# Altium PCB PCB1.PcbDoc
Units mil, origin at the board's own origin, x right, y up, seen from the top; angles counter-clockwise.
Board outline 6000 x 4000 mil, 2 copper layers (Top Layer, Bottom Layer); 50 components, 34 nets, 157 pads, 16 vias.
Unrouted connection lines stored in the file: 5.
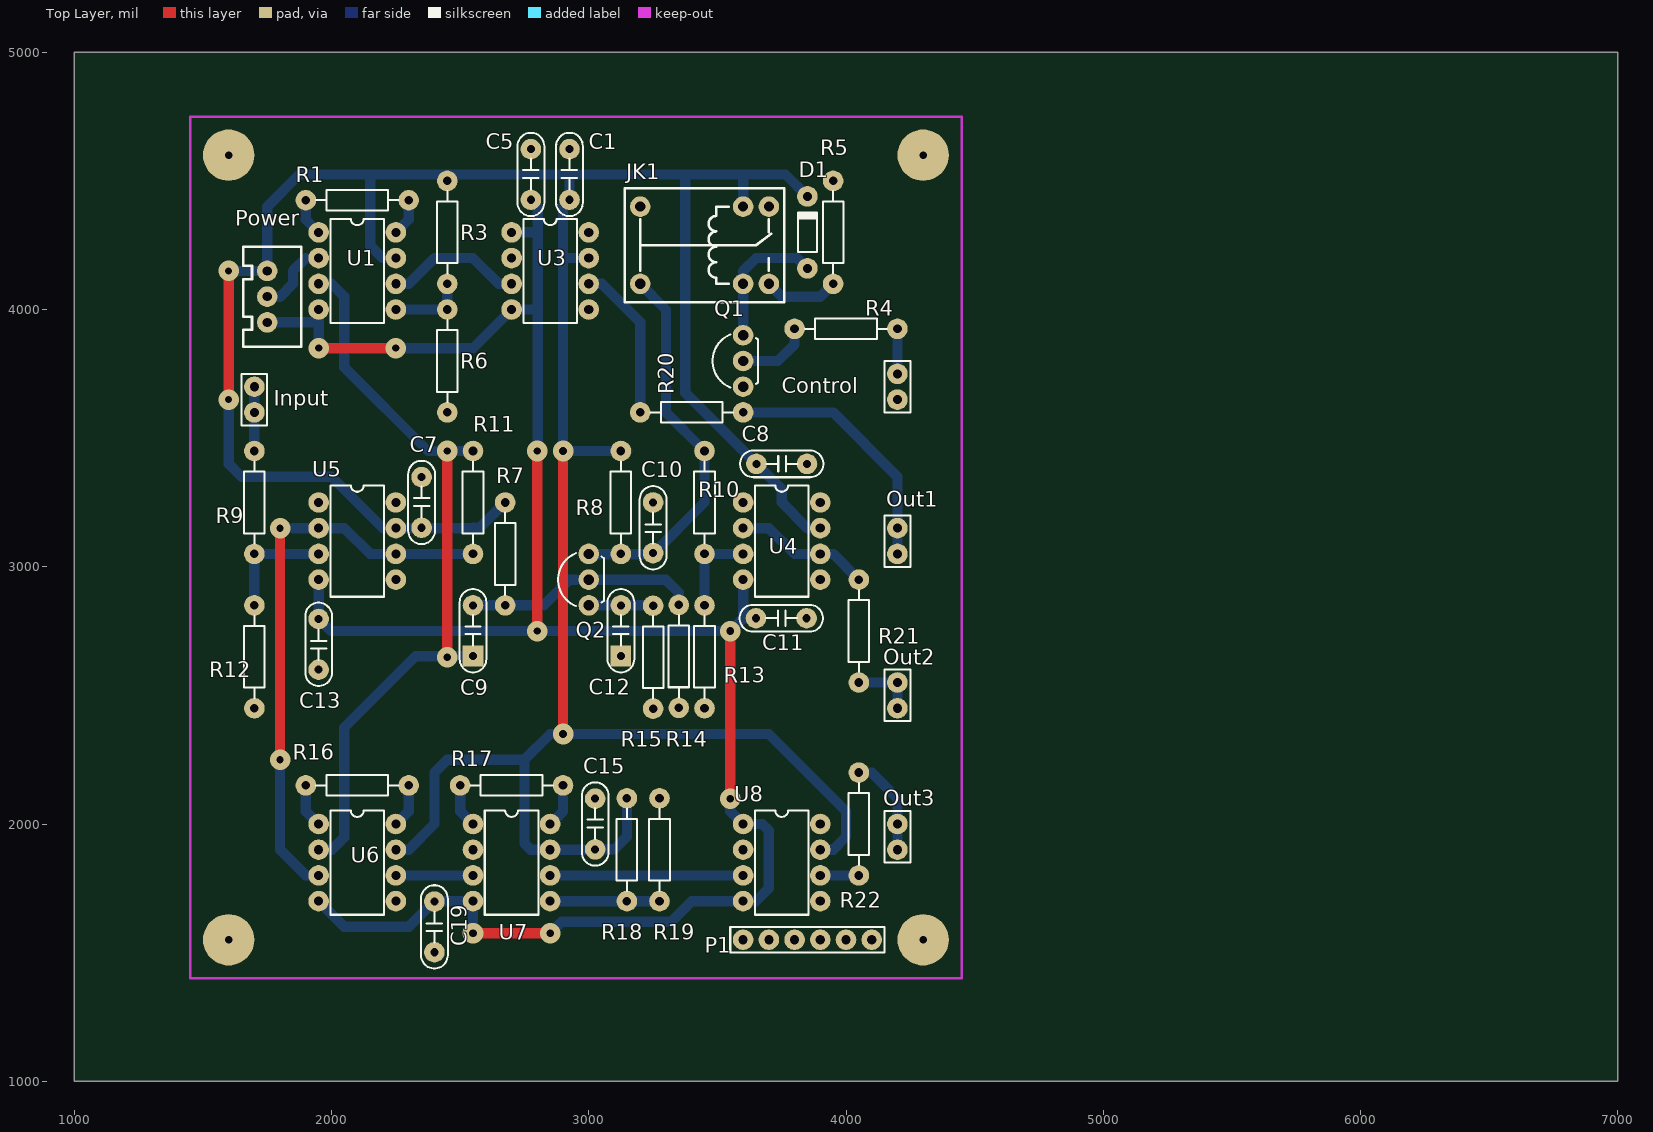
[diagram p0: Top Layer view]
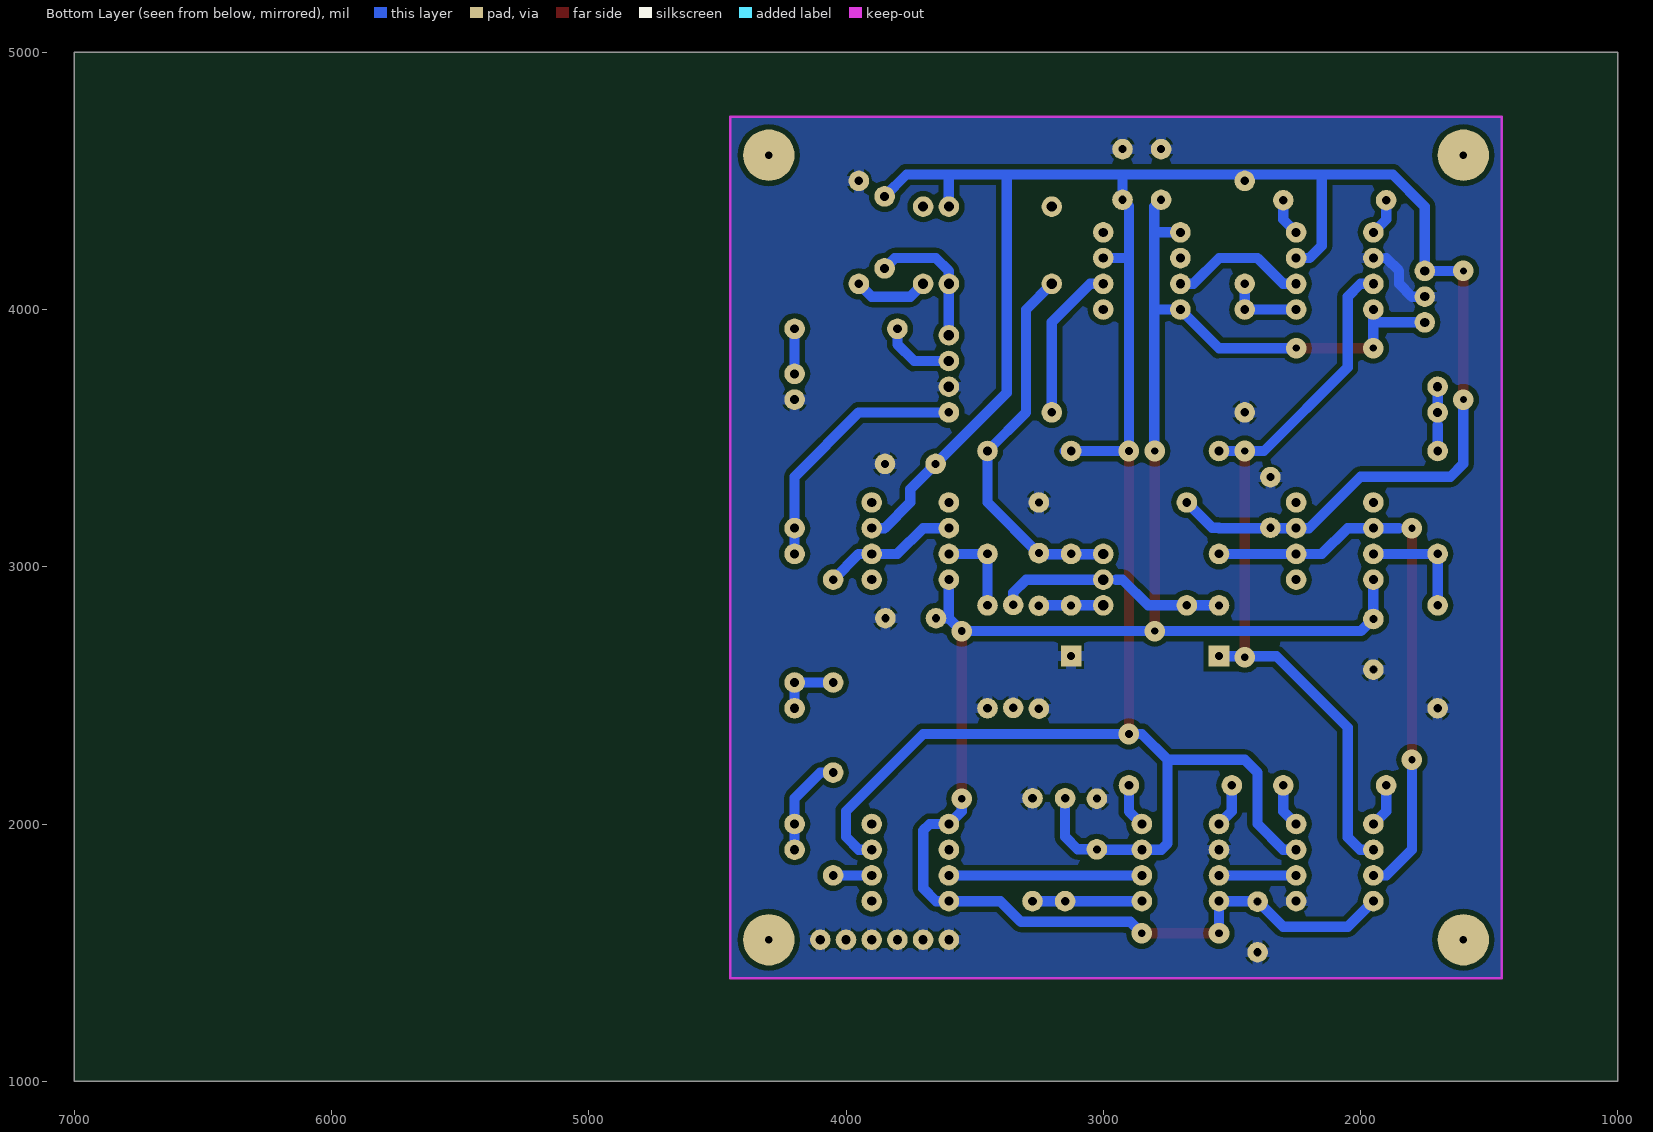
[diagram p1: Bottom Layer view, seen from below]

## Layer stack, top to bottom
Top Solder: solder mask 0.4, Solder Resist, Dk 3.5
Top Layer: signal copper 1.4
Dielectric 1: dielectric 12.6, FR-4, Dk 4.8
Bottom Layer: signal copper 1.4
Bottom Solder: solder mask 0.4, Solder Resist, Dk 3.5

## Board outline
1000,1000 7000,1000 7000,5000 1000,5000

## Design rules (kind name [scope] priority, off if disabled: settings)
Clearance [All] p1: gap=20 ignorepadtopadclearanceinfootprint=FALSE
PlaneConnect [All] p1: planeconnectstyle=Relief reliefexpansion=20 reliefentries=4 reliefconductorwidth=20 reliefairgap=10
PolygonConnect [All] p1: connectstyle=Relief reliefconductorwidth=40 reliefentries=4 polygonreliefangle="90 Angle" airgapwidth=10
RoutingVias [All] p1: holewidth=28 width=50 viastyle="Through Hole" minholewidth=28 minwidth=50 maxholewidth=28 maxwidth=50
SolderMaskExpansion [All] p1: expansion=4 istentingtop=FALSE
Width [All] p1: maxlimit=40 minlimit=10 preferedwidth=40
29 further rules are at their usual default settings.

## Components (designator, comment, footprint, x,y, rotation, side; value= is the part's Value field where it differs from the comment)
C1 "0.1uF/275V" CBB-CL71#1 2925,4525 r90 top
C5 "0.1uF/275V" CBB-CL71#1 2775,4525 r90 top
C7 "0.1uF/275V" CBB-CL71#1 2350,3250 r90 top
C8 "0.1uF/275V" CBB-CL71#1 3750,3400 r0 top
C9 "10u" CBB-CL71#2 2550,2751.57 r90 top
C10 "470p" CBB-CL71#1 3250,3151.57 r270 top
C11 "0.1uF/275V" CBB-CL71#1 3748.42,2800 r0 top
C12 "47u" CBB-CL71#2 3125,2751.57 r90 top
C13 "0.1uF/275V" CBB-CL71#1 1950,2698.43 r270 top
C15 "0.1uF/275V" CBB-CL71#1 3025,2000 r90 top
C19 "0.1uF/275V" CBB-CL71#1 2400,1600 r270 top
Control "Head 2" HDR1X2 4200,3650 r90 top
D1 "1N4148" DO-35 3850,4300 r90 top
Input "Head 2" HDR1X2 1700,3600 r90 top
JK1 "HK4100F" HK4100F 3450,4250 r180 top
Out1 "Header 2" HDR1X2 4200,3050 r90 top
Out2 "Header 2" HDR1X2 4200,2450 r90 top
Out3 "Header 2" HDR1X2 4200,1900 r90 top
P1 "Header 6" HDR1X6 3600,1550 r0 top
Power "Header 3" XH2.54-LI-3P 1750,4050 r90 top
Q1 "S9013" TO92 3600,3800 r90 top
Q2 "S9013" TO92 3000,2950 r90 top
R1 "" AXIAL-0.4 2100,4425 r180 top value=2k
R3 "" AXIAL-0.4 2450,4300 r90 top value=8.2k
R4 "" AXIAL-0.4 4000,3925 r0 top value=3.3k
R5 "" AXIAL-0.4 3950,4300 r270 top value=3k
R6 "" AXIAL-0.4 2450,3800 r90 top value=1.5k
R7 "" AXIAL-0.4 2675,3050 r90 top value=43k
R8 "" AXIAL-0.4 3125,3250 r90 top value=2k
R9 "" AXIAL-0.4 1700,3250 r90 top value=100k
R10 "" AXIAL-0.4 3450,3250 r90 top value=820k
R11 "" AXIAL-0.4 2550,3250 r270 top value=2.2k
R12 "" AXIAL-0.4 1700,2650 r90 top value=4.7k
R13 "" AXIAL-0.4 3450,2650 r90 top value=270k
R14 "" AXIAL-0.4 3350,2651.57 r90 top value=15k
R15 "" AXIAL-0.4 3250,2648.43 r90 top value=1K
R16 "" AXIAL-0.4 2100,2150 r180 top value=2k
R17 "" AXIAL-0.4 2700,2150 r180 top value=18k
R18 "" AXIAL-0.4 3148.43,1900 r90 top value=8.2k
R19 "" AXIAL-0.4 3275,1900 r270 top value=1.5k
R20 "" AXIAL-0.4 3400,3600 r180 top value=1k
R21 "" AXIAL-0.4 4050,2750 r90 top value=1k
R22 "" AXIAL-0.4 4050,2000 r270 top value=1k
U1 "INA128PA" 006E 2100,4150 r270 top
U3 "BUF634P" 006E 2850,4150 r270 top
U4 "OP27GP" N-8_A 3750,3100 r270 top
U5 "OP27GP" N-8_A 2100,3100 r270 top
U6 "INA128PA" 006E 2100,1850 r270 top
U7 "INA128PA" 006E 2700,1850 r270 top
U8 "BUF634P" 006E 3750,1850 r270 top

## Footprints (in the part's own frame and the unit in brackets; to place one, negate y for a bottom-side part, rotate by r counter-clockwise, add the part's x,y. Pads: shape width x height; smd on the part's side, far side on the other; paste and mask are expansions set on the pad)
006E [mil] "DIP; 8 Leads; Row Spacing 7.62 mm; Pitch 2.54 mm"
  round 80 hole 35.43: 1(-150,-150) 2(-50,-150) 3(50,-150) 4(150,-150) 5(150,150) 6(50,150) 7(-50,150) 8(-150,150)
  silkscreen extent -203,-104 203,104
AXIAL-0.4 [mil] "Axial Device, Thru-Hole; 2 Leads; 0.4 in Pin Spacing"
  round 80 hole 33.46: 1(-200,0) 2(200,0)
  silkscreen extent -160,-40 160,40
CBB-CL71#1 [mil] "7.2mm*2.3mm*6.5mm(长*宽*高）"
  round 80 hole 31.5: 1(-98.43,0) 2(98.43,0)
  silkscreen extent -162,-52 162,52, body extent -142,-45 142,45, height 258
CBB-CL71#2 [mil] "7.2mm*2.3mm*6.5mm(长*宽*高）"
  rect 80x80 hole 31.5: 1(-98.43,0)
  round 80 hole 31.5: 2(98.43,0)
  silkscreen extent -162,-52 162,52, body extent -142,-45 142,45, height 258
DO-35 [mil] "Diode, Axial; Body 3.8 x 1.9 mm (LxDia. max), Lead Dia. 0.53 mm (max)"
  round 80 hole 35.43: 1(-139.76,0) 2(139.76,0)
  silkscreen extent -77,-37 81,37
HDR1X2 [mil] "Connector; Header; 2 Position"
  round 80 hole 35.43: 1(0,0) 2(100,0)
  silkscreen extent -50,-50 150,50
HDR1X6 [mil] "Connector; Header; 6 Position"
  round 80 hole 35.43: 1(0,0) 2(100,0) 3(200,0) 4(300,0) 5(400,0) 6(500,0)
  silkscreen extent -50,-50 550,50
HK4100F [mil] "单刀双投"
  round 80 hole 39.37: 1(-150,150) 2(-150,-150) 3(250,150) 3(250,-150) 4(-250,150) 5(-250,-150)
  silkscreen extent -310,-221 310,221, body extent -305,-217 305,217, height 480
N-8_A [mil] "DIP; 8 Leads; Row Spacing 7.62 mm; Pitch 2.54 mm"
  round 80 hole 35.43: 1(-150,-150) 2(-50,-150) 3(50,-150) 4(150,-150) 5(150,150) 6(50,150) 7(-50,150) 8(-150,150)
  silkscreen extent -217,-104 217,104
TO92 [mil]
  round 80 hole 40: 1(-100,0) 2(0,0) 3(100,0)
  silkscreen extent -103,-58 103,119
XH2.54-LI-3P [mil] "接插件，3P"
  round 80 hole 35.43: 1(-100,0) 2(0,0) 3(100,0)
  silkscreen extent -195,-133 194,94, body extent -198,-130 198,94, height 277

## Part data
C1 C5 C7 C8 C9 C10 C11 C12 C13 C15 C19: library part C-CBB, "CBB电容", BOM名称=CBB电容, 学习资源=www.ooocke.com, 版权归属=源创客
Control Input: library part "Header 2", "Header, 2-Pin", LatestRevisionDate=17-Jul-2002, LatestRevisionNote="Re-released for DXP Platform.", Publisher="Altium Limited"
D1: "高速开关二极管", BOM名称=高速开关二极管, 学习资源=www.ooocke.com, 版权归属=源创客
JK1: "一组转换", BOM名称=一组继电器, 学习资源=www.ooocke.com, 版权归属=源创客
Out1 Out2 Out3: "Header, 2-Pin", LatestRevisionDate=17-Jul-2002, LatestRevisionNote="Re-released for DXP Platform.", Publisher="Altium Limited"
P1: "Header, 6-Pin", LatestRevisionDate=17-Jul-2002, LatestRevisionNote="Re-released for DXP Platform.", Publisher="Altium Limited"
Power: "Header, 3-Pin", LatestRevisionDate=17-Jul-2002, LatestRevisionNote="Re-released for DXP Platform.", Publisher="Altium Limited"
Q1 Q2: library part 9013-DIP, "低频放大-NPN型", BOM名称=低频放大-NPN型, 学习资源=www.ooocke.com, 属性="50V 0.5A 0.625W", 版权归属=源创客
R1 R3 R4 R5 R6 R7 R8 R9 R10 R11 R12 R13 R14 R15 R16 R17 R18 R19 R20 R21 R22: library part Res2, "Resistor", LatestRevisionDate=17-Jul-2002, LatestRevisionNote="Re-released for DXP Platform.", PackageDescription="Axial Device, Thru-Hole; 2 Leads; 0.4 in Pin Spacing", PackageReference=AXIAL-0.4, Published=8-Jun-2000, Publisher="Altium Limited"
U1 U6 U7: "Precision, Low-Power Instrumentation Amplifiers", ComponentLink1Description="Manufacturer Link", ComponentLink1URL=http://www.ti.com/, ComponentLink2Description=Datasheet, ComponentLink2URL=http://www-s.ti.com/sc/ds/INA128.pdf, DatasheetVersion=Oct-1996, LatestRevisionDate=06-Jun-2005, LatestRevisionNote="Stylized 3D Model Added.", PackageDescription="DIP; 8 Leads; Row Spacing 7.62 mm; Pitch 2.54 mm", PackageReference=006E, PackageVersion=revE, Published=8-Jun-2000, Publisher="Altium Limited"
U3 U8: "250mA High-Speed Buffer", ComponentLink1Description="Manufacturer Link", ComponentLink1URL=http://www.ti.com/, ComponentLink2Description=Datasheet, ComponentLink2URL=http://www-s.ti.com/sc/ds/BUF634.pdf, DatasheetVersion=Jun-1996, LatestRevisionDate=06-Jun-2005, LatestRevisionNote="Stylized 3D Model Added.", Note="Pins 2, 5 and 8 are No internal Connection (NC) pins.", PackageDescription="DIP; 8 Leads; Row Spacing 7.62 mm; Pitch 2.54 mm", PackageReference=006E, PackageVersion=revE, Published=8-Jun-2000, Publisher="Altium Limited"
U4 U5: "Low-Noise, Precision Operational Amplifier", Code_JEDEC=MO-001-AN, ComponentLink1Description="Manufacturer Link", ComponentLink1URL=http://www.analog.com/en/prod/0,,759_786_OP27%2C00.html, ComponentLink2Description=Datasheet, ComponentLink2URL=http://www.analog.com/UploadedFiles/Data_Sheets/314538596OP27_c.pdf, DatasheetVersion=1992, LatestRevisionDate=04-Mar-2005, LatestRevisionNote="Stylized 3D Model Added.", Note="Pin 5 is not connected.", PackageDescription="DIP; 8 Leads; Row Spacing 7.62 mm; Pitch 2.54 mm", PackageReference=N-8_A, Published=8-Jun-2000, Publisher="Altium Limited"

## Free pads (board coordinates)
  round 200 hole 30: 2(1600,1550) 4(1600,4600) 4(4300,4600) 5(4300,1550)

## Via types
v1: diameter 80, hole 28, Top Layer to Bottom Layer, 11 vias
v2: diameter 80, hole 30, Top Layer to Bottom Layer, 5 vias

## Nets (pads, with @x,y where several pads share a name; then routed paths per layer and width w, separated by ;. In a path a pad name is that pad's centre, name@x,y a point inside that pad or via, vN(x,y) a via of type N, cw(c..) or ccw(c..) an arc to the next point about the centre after c; other vN are vias at no path point)
+12: C1.1 C7.1 C8.1 C15.1 D1.2 JK1.2 Power.3 R3.2 R7.2 R8.2 R18.2 U1.7 U3.7 U4.7 U5.7 U6.7 U7.7 U8.7 | length 12547.6
  Top Layer w40: v1(1600,3650) v1(1600,4150) ; v2(2900,2350) v2(2900,3450)
  Bottom Layer w40: v1(1600,3650) 1600,3400 1650,3350 2000,3350 2200,3150 U5.7 2549.21,3150 ; v1(1600,4150) Power.3 1750,4400 1875,4525 2150,4525 ; U6.7 2300,1900 2400,2000 2400,2200 2450,2250 2750,2250 ; U1.7 2198.42,4200 2150,4248.42 2150,4525 ; 2550,3151.57 2576.57,3151.57 R7.2 ; U3.7 2900,4200 ; C15.1@3025,1900 U7.7 2775,1900 2750,1925 2750,2250 ; C15.1 3100,1901.57 3148.43,1950 R18.2 ; R8.2@3150,3450 v2(2900,3450) 2900,4200 ; JK1.2 3600,4525 ; D1.2 3764.76,4525 3600,4525 ; U8.7@3892.35,1907.65 U8.7 3950,1900 4000,1950 4000,2050 3700,2350 v2(2900,2350) 2850,2350 2750,2250 ; U4.7 3850,3150 3750,3250 3750,3301.57 C8.1 3375,3676.57 3375,4525 ; 2150,4525 2925,4525 ; 2900,4200 2900,4401.57 C1.1 2925,4525 ; 2925,4525 3375,4525 ; 3375,4525 3600,4525
-12: C5.1 C11.1 C13.1 C19.1 Power.1 U1.4 U3.1 U3.4 U4.4 U5.4 U6.4 U7.4 U8.1 U8.4 | length 8218.6
  Top Layer w40: v1(1950,3850) v1@2263.51,3850 ; v2(2550,1575) v2(2850,1575) ; v1(2800,2750) v1(2800,3450) ; v1(3550,2098.43) v2(3550,2750)
  Bottom Layer w40: Power.1 1950,3950 ; U6.4 2050,1600 2300,1600 2400,1700 U7.4 v2@2550,1600 ; U5.4 1950,2798.43 1998.43,2750 v2(3550,2750) 3600,2800 ; v1(1950,3850) U1.4 ; v1(2250,3850) 2550,3850 U3.4 2800,4000 ; U3.1 2801.57,4300 ; C5.1 2801.57,4400 2801.57,4300 ; v1(2800,3450) 2801.57,3476.57 2801.57,4300 ; v2(2850,1575) 2895,1620 3320,1620 3400,1700 U8.4 3650,1700 3700,1750 3700,1975 3675,2000 U8.1 3550,2050 v1(3550,2098.43) ; U4.4 3600,2800 ; C11.1 3600,2800
GND: C1.2 C5.2 C7.2 C8.2 C10.1 C11.2 C12.1 C13.2 C15.2 C19.2 Control.1 P1.1 P1.2 P1.3 P1.4 P1.5 P1.6 Power.2 Q1.1 R5.1 R6.1 R12.1 R13.1 R14.1 R15.1 R19.1 U1.2 U6.5 U7.2 | length 252.2
  Bottom Layer w40: Power.2 1800,4050 1850,4100 1850,4150 1900,4200 ; U7.2 U7.2@2560.82,1900
NetC9_1: C9.1 R11.1 U1.3 U6.2 | length 2993.1
  Top Layer w40: v1(2450,2648.43) v1(2450,3450)
  Bottom Layer w40: U6.2 2001.57,1900 2050,1948.43 2050,2375 2326.57,2651.57 C9.1@2550,2651.57 ; U1.3 2000,4100 2050,4050 2050,3775 2375,3450 v1(2450,3450) R11.1
NetC9_2: C9.2 Q2.2 R7.1 R14.2 | length 860.6
  Bottom Layer w40: C9.2 R7.1 2825,2850 2925,2950 2950,2950 ; Q2.2 3300,2950 3350,2900 R14.2
NetC10_2: C10.2 JK1.3 Q2.3 R8.1 R10.2 | length 1487.7
  Bottom Layer w40: Q2.3 3001.58,3048.42 3248.42,3048.42 3450,3250 R10.2 3300,3600 3300,4000 JK1.3@3200,4100
NetC12_2: C12.2 Q2.1 R15.2 | length 250
  Bottom Layer w40: Q2.1 R15.2@3250,2850
NetControl_2: Control.2 R4.2 | length 175
  Bottom Layer w40: Control.2 R4.2
NetD1_1: D1.1 JK1.1 Q1.3 | length 537.2
  Bottom Layer w40: Q1.3 JK1.1 3600,4150 3650,4200 3810.24,4200 D1.1
NetInput_1: Input.1 Input.2 R9.2 | length 200
  Bottom Layer w40: R9.2 1700,3550 ; Input.1 Input.2
NetJK1_4: JK1.4 R5.2 | length 291.4
  Bottom Layer w40: JK1.4 3750,4050 3900,4050 R5.2
NetOut1_1: Out1.1 Out1.2 R20.1 | length 1003.6
  Bottom Layer w40: R20.1 3950,3600 4200,3350 Out1.2 Out1.1
NetOut2_1: Out2.1 Out2.2 R21.1 | length 250
  Bottom Layer w40: R21.1 Out2.2 Out2.1
NetOut3_1: Out3.1 Out3.2 R22.1 | length 391.4
  Bottom Layer w40: R22.1 4100,2200 4200,2100 Out3.2 Out3.1
NetQ1_2: Q1.2 R4.1 | length 286.9
  Bottom Layer w40: Q1.2 3735,3800 3800,3865 R4.1
NetR1_1: R1.1 U1.8 | length 145.7
  Bottom Layer w40: U1.8 2300,4350 R1.1
NetR1_2: R1.2 U1.1 | length 145.7
  Bottom Layer w40: R1.2 1900,4350 U1.1
NetR3_1: R3.1 R6.2 U1.5 | length 300
  Bottom Layer w40: U1.5 R6.2 R3.1
NetR9_1: R9.1 R12.2 U5.3 | length 450
  Bottom Layer w40: R12.2 R9.1 U5.3
NetR10_1: R10.1 R13.2 U4.3 | length 350
  Bottom Layer w40: R13.2 R10.1 U4.3
NetR11_2: R11.2 U5.2 U5.6 U6.3 | length 2182.8
  Top Layer w40: v1(1800,2250) v1(1800,3150)
  Bottom Layer w40: v1(1800,2250) 1800,1900 1900,1800 U6.3 ; 1850,3150 U5.2 2050,3150 2150,3050 U5.6 R11.2
NetR16_1: R16.1 U6.8 | length 170.7
  Bottom Layer w40: U6.8 2300,2050 R16.1
NetR16_2: R16.2 U6.1 | length 170.7
  Bottom Layer w40: R16.2 1900,2050 U6.1
NetR17_1: R17.1 U7.8 | length 170.7
  Bottom Layer w40: U7.8 2900,2050 R17.1
NetR17_2: R17.2 U7.1 | length 170.7
  Bottom Layer w40: R17.2 2500,2050 U7.1
NetR18_1: R18.1 R19.2 U7.5 | length 425
  Bottom Layer w40: U7.5 3025,1700 R19.2
NetR20_2: R20.2 U3.6 | length 612.1
  Bottom Layer w40: U3.6 3050,4100 3200,3950 R20.2
NetR21_2: R21.2 U4.2 U4.6 | length 532.8
  Bottom Layer w40: U4.2 3700,3150 3800,3050 U4.6 3950,3050 R21.2
NetR22_2: R22.2 U8.6 | length 150
  Bottom Layer w40: U8.6 R22.2
NetU1_6: U1.6 U3.3 | length 532.8
  Bottom Layer w40: U1.6 2300,4100 2400,4200 2550,4200 2650,4100 U3.3
NetU3_2: U3.2 U3.5 U3.8
NetU6_6: U6.6 U7.3 | length 300
  Bottom Layer w40: U6.6 U7.3
NetU7_6: U7.6 U8.3 | length 750
  Bottom Layer w40: U7.6 U8.3
NetU8_2: U8.2 U8.5 U8.8
pads on no net: JK1.5 U4.1 U4.5 U4.8 U5.1 U5.5 U5.8

## Polygon pours and split planes (outlines as drawn)
GND on Bottom Layer "Top Layer-No Net" (solid, remove dead copper, pour order 3): 1450,4750 4450,4750 4450,1400 1450,1400

## Keep-outs
Keep-Out Layer:
  lines w10: 1450,1400 4450,1400 4450,4750 1450,4750 1450,1400